# Altium PCB Telemetry_TempSense.PcbDoc
Units mm, origin at the board's own origin, x right, y up, seen from the top; angles counter-clockwise.
Board outline 18 x 39 mm, 2 copper layers (Top Layer, Bottom Layer); 8 components, 6 nets, 25 pads, 1 vias.
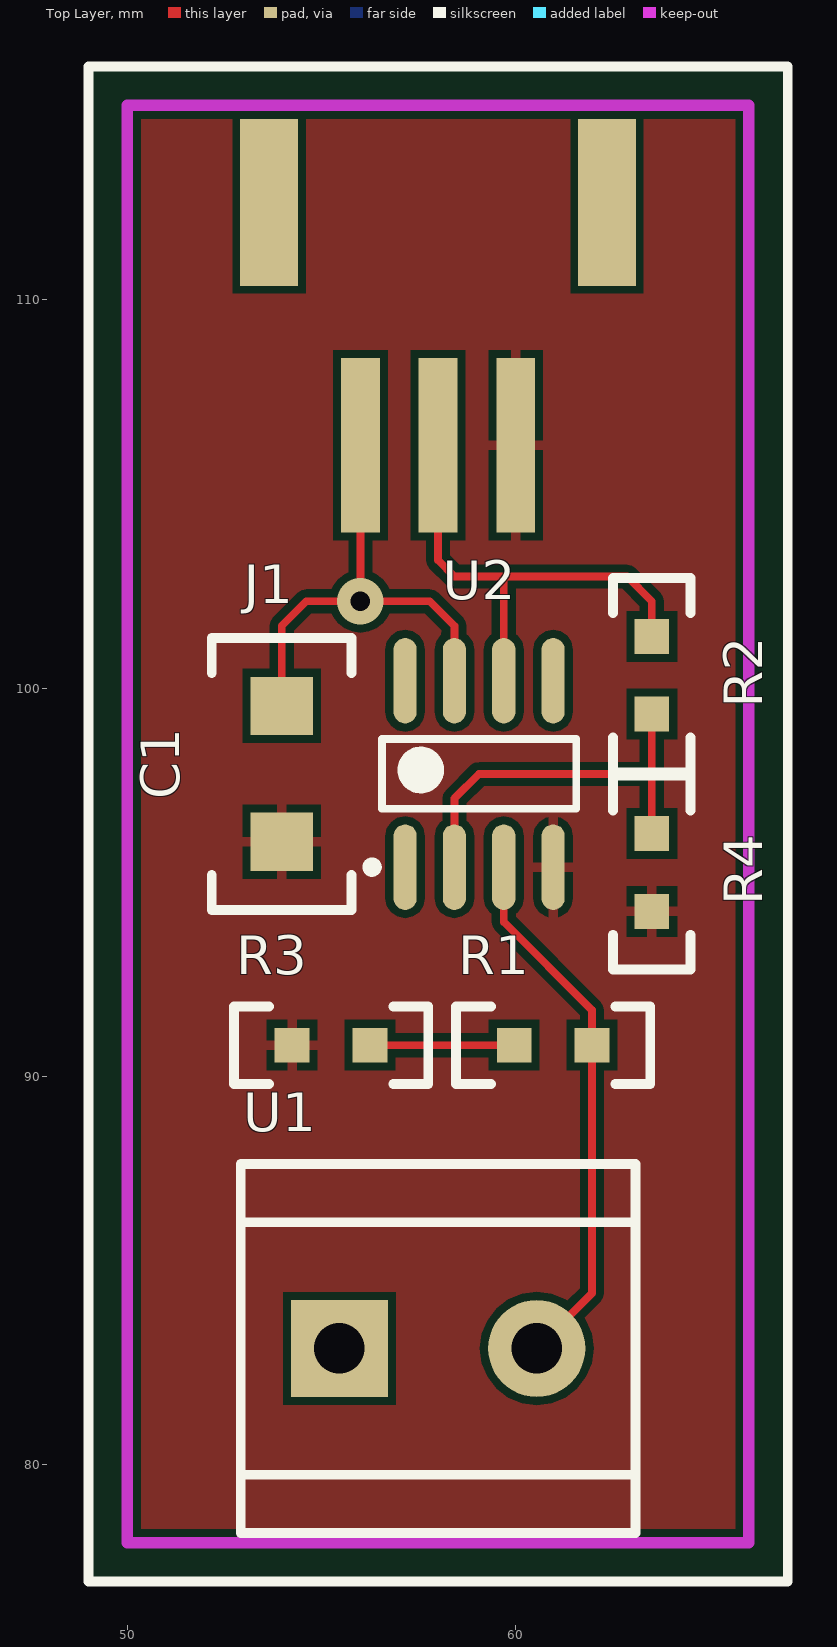
[diagram p0: Top Layer view]
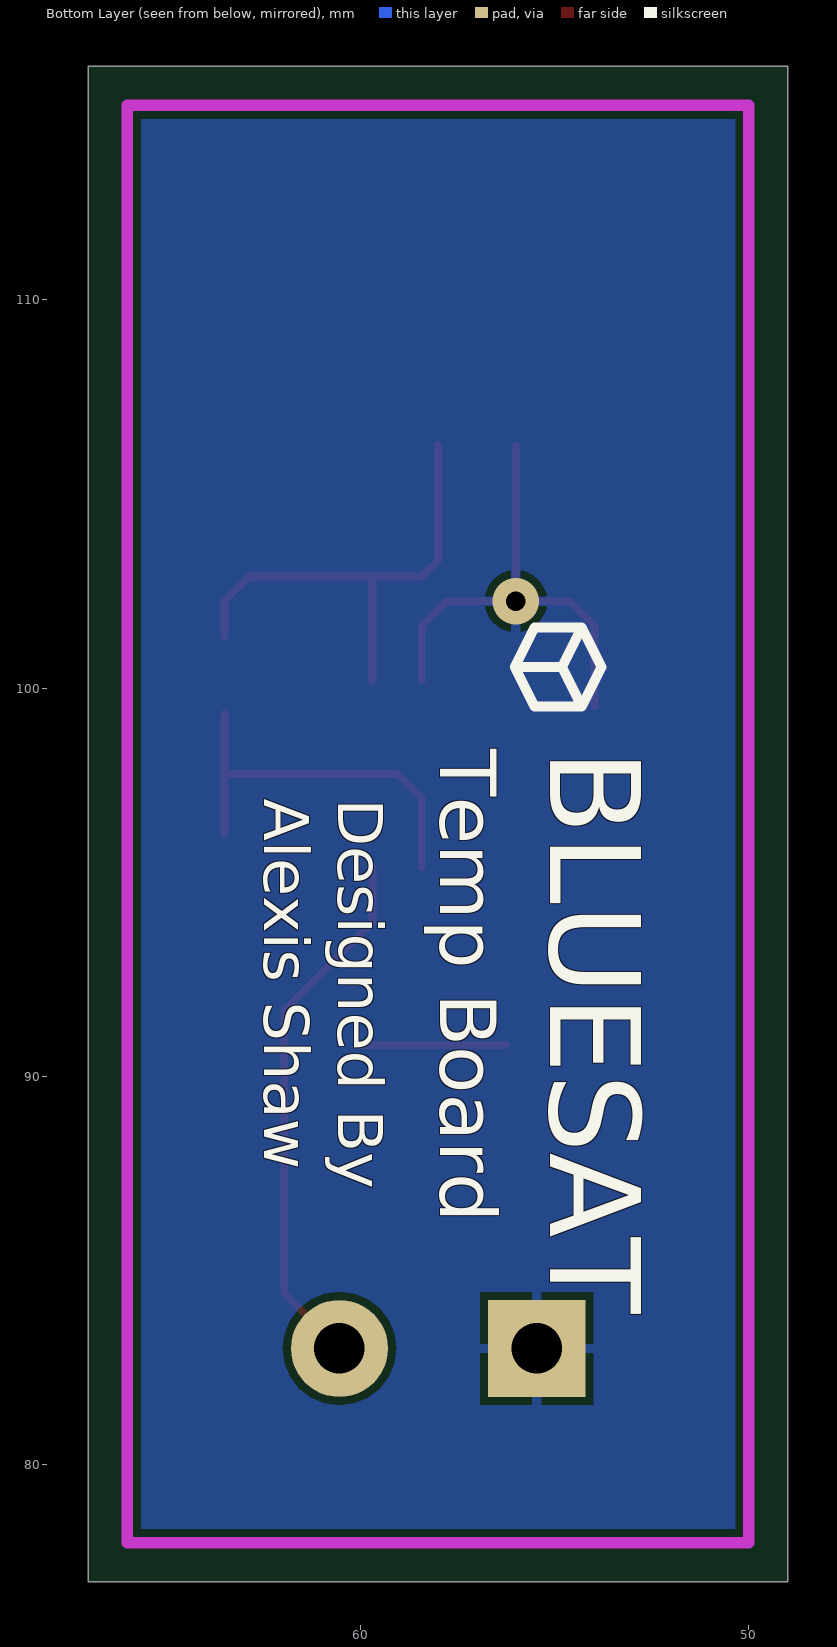
[diagram p1: Bottom Layer view, seen from below]

## Layer stack, top to bottom
Top Layer: signal copper 0.0356
Dielectric: dielectric 0.32, FR-4, Dk 4.8
Bottom Layer: signal copper 0.0356

## Board outline
49,77 67,77 67,116 49,116

## Design rules (kind name [scope] priority, off if disabled: settings)
Clearance [All] p1: gap=0.2
PolygonConnect [All] p1: connectstyle=Relief reliefconductorwidth=0.254 reliefentries=4 polygonreliefangle="90 Angle"
RoomDefinition TELM0003_TempSense [InComponentClass('TELM0003_TempSense')] p1: confinementstyle=ConfineIn formatcopy=TRUE lockcomponents=FALSE outline 50,77.5 66,77.5 66,115 50,115
RoutingVias [All] p1: holewidth=0.3 width=0.7 viastyle="Through Hole" minholewidth=0.711 minwidth=1.27 maxholewidth=0.711 maxwidth=1.27
SilkscreenOverComponentPads [All] p1: minsilkscreentomaskgap=0.254
SolderMaskExpansion [All] p1: expansion=0.102
Width [All] p1: maxlimit=0.2 minlimit=0.2 preferedwidth=0.2
27 further rules are at their usual default settings.

## Components (designator, comment, footprint, x,y, rotation, side; value= is the part's Value field where it differs from the comment)
C1 "1206 Cap" "1206 Cap" 53.975,97.79 r270 top
J1 "S3B-PH-SM4-TB" S3B-PH-SM4-TB 58,114 r180 top
R1 "0603 Resistor" "0603 Resistor" 60.96,90.805 r180 top
R2 "0603 Resistor" "0603 Resistor" 63.5,100.33 r90 top
R3 "0603 Resistor" "0603 Resistor" 55.245,90.805 r180 top
R4 "0603 Resistor" "0603 Resistor" 63.5,95.25 r270 top
U1 "AD590KF" "5.05mm Terminal Block - 2" 58,83 r0 top
U2 "ADA4528-1" "SOIC8 - LME49720" 59.055,97.79 r90 top

## Footprints (in the part's own frame and the unit in brackets; to place one, negate y for a bottom-side part, rotate by r counter-clockwise, add the part's x,y. Pads: shape width x height; smd on the part's side, far side on the other; paste and mask are expansions set on the pad)
"5.05mm Terminal Block - 2" [mm]
  rect 2.5x2.5 hole 1.3: 1(-2.54,0)
  round 2.5 hole 1.3: 2(2.54,0)
  silkscreen extent -5.08,-4.75 5.08,4.75
"0603 Resistor" [mm] "0603 Resistor"
  rect 0.9x0.9 smd: 1(1,0) 2(-1,0)
  silkscreen extent -2.5,-1 2.5,1, body extent -0.8,-0.43 0.8,0.43, height 0.55
"1206 Cap" [mm] "1206 Capacitor"
  rect 1.5x1.6 smd: 1(1.75,0) 2(-1.75,0)
  silkscreen extent -3.5,-1.8 3.5,1.8, body extent -1.6,-0.8 1.6,0.8, height 1.8
S3B-PH-SM4-TB [mm]
  rect 1x4.5 smd: 1(-2,7.75) 2(0,7.75) 3(2,7.75)
  rect 1.5x4.3 smd: MECH(-4.35,1.5) MECH(4.35,1.5)
  body extent -4.95,0.2 4.95,8.8, height 5.5
"SOIC8 - LME49720" [mm]
  oval 2.2x0.6 smd: 1(-2.4,1.905) 2(-2.4,0.635) 3(-2.4,-0.635) 4(-2.4,-1.905) 5(2.4,-1.905) 6(2.4,-0.635) 7(2.4,0.635) 8(2.4,1.905)
  silkscreen extent -2.52,-2.5 0.9,2.88, body extent -2,-2.5 2,2.5, height 1.5

## Part data
C1: library part "1206 MLCC - X7R, 10%", "1206 MLCC - X7R, 10%"
J1: "JST connector"
R1 R2 R3 R4: library part "0603 Thin Film Resistor 0.1%", "0603 Thin Film Resistor 0.1%"
U1: "Temperature sensor IC"
U2: "Dual, High Performance Audio Operational Amplifier"

## Via types
v1: diameter 1.2, hole 0.5, Top Layer to Bottom Layer, 1 vias

## Nets (pads, with @x,y where several pads share a name; then routed paths per layer and width w, separated by ;. In a path a pad name is that pad's centre, name@x,y a point inside that pad or via, vN(x,y) a via of type N, cw(c..) or ccw(c..) an arc to the next point about the centre after c; other vN are vias at no path point)
5V0: C1.2 J1.3 U1.1 U2.7 | length 12.5
  Top Layer w0.2: C1.2 53.975,101.6 54.61,102.235 57.785,102.235 58.42,101.6 U2.7 ; v1(56,102.235) J1.3
GND: C1.1 J1.1 R3.1 R4.1 U2.4
NetJ1_2: J1.2 R2.1 U2.6 | length 12.5
  Top Layer w0.2: J1.2 58,103.29 58.42,102.87 59.69,102.87 ; U2.6 59.69,102.87 ; R2.1 63.5,102.235 62.865,102.87 59.69,102.87
NetR1_1: R1.1 R3.2 | length 3.7
  Top Layer w0.2: R3.2 R1.1
NetR1_2: R1.2 U1.2 U2.3 | length 13.9
  Top Layer w0.2: U2.3 59.69,93.98 61.96,91.71 R1.2 61.96,84.42 U1.2
NetR2_2: R2.2 R4.2 U2.2 | length 10.2
  Top Layer w0.2: U2.2 58.42,97.155 59.055,97.79 63.5,97.79 ; R4.2 R2.2
pads on no net: J1.MECH U2.1 U2.5 U2.8

## Polygon pours and split planes (outlines as drawn)
GND on Top Layer "Bottom Layer-No Net" (solid, pour order 4): 50,78 66,78 66,115 50,115
5V0 on Bottom Layer "Bottom Layer-No Net" (solid, pour order 6): 50,115 66,115 66,78 50,78

## Keep-outs
Keep-Out Layer:
  lines w0.3: 50,78 50,115 66,115 66,78 50,78

## Silkscreen, mask and mechanical layers (free items; w line width, h text height)
Top Overlay:
  the board outline again, w0.254
Bottom Overlay:
  lines w0.254: 54.302,99.524 53.794,100.54 54.302,101.556 ; 54.302,99.524 54.81,100.54 ; 54.302,99.524 55.52,99.524 56.028,100.54 ; 54.302,101.556 54.81,100.54 ; 54.302,101.556 55.52,101.556 56.028,100.54 ; 54.81,100.54 56.028,100.54
  text "BLUESAT" at 55.88,98.425 h4 r90
  text "Temp Board" at 58.42,98.425 h2.49 r90
  text "Designed By" at 60.96,97.155 h2 r90
  text "Alexis Shaw" at 62.865,97.155 h2 r90
Drill Drawing:
  text ".LEGEND" at 74.881,67.89 h1.52
  text "Drill Drawing." at 74.881,65.35 h1.52

## Dimensions
50,78 to 50,115 on Mechanical 1
50,78 to 66,78 on Mechanical 1